# EAGLE board comp-btm (EAGLE 9.6.0)
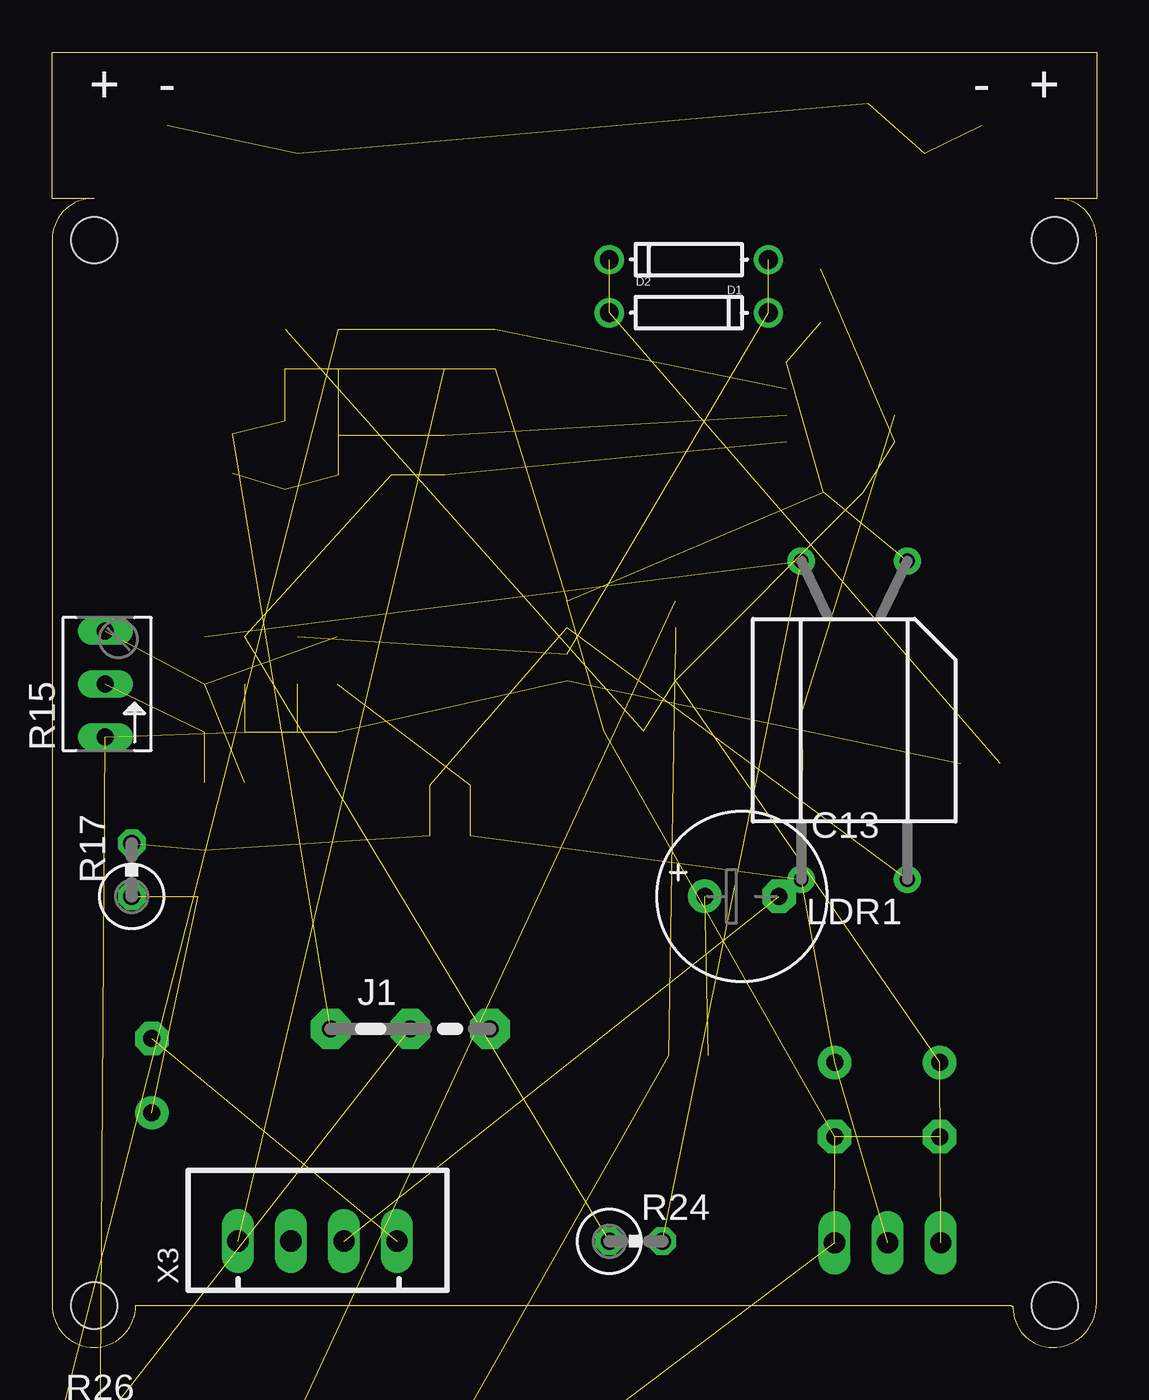
[diagram p0: board, top side]
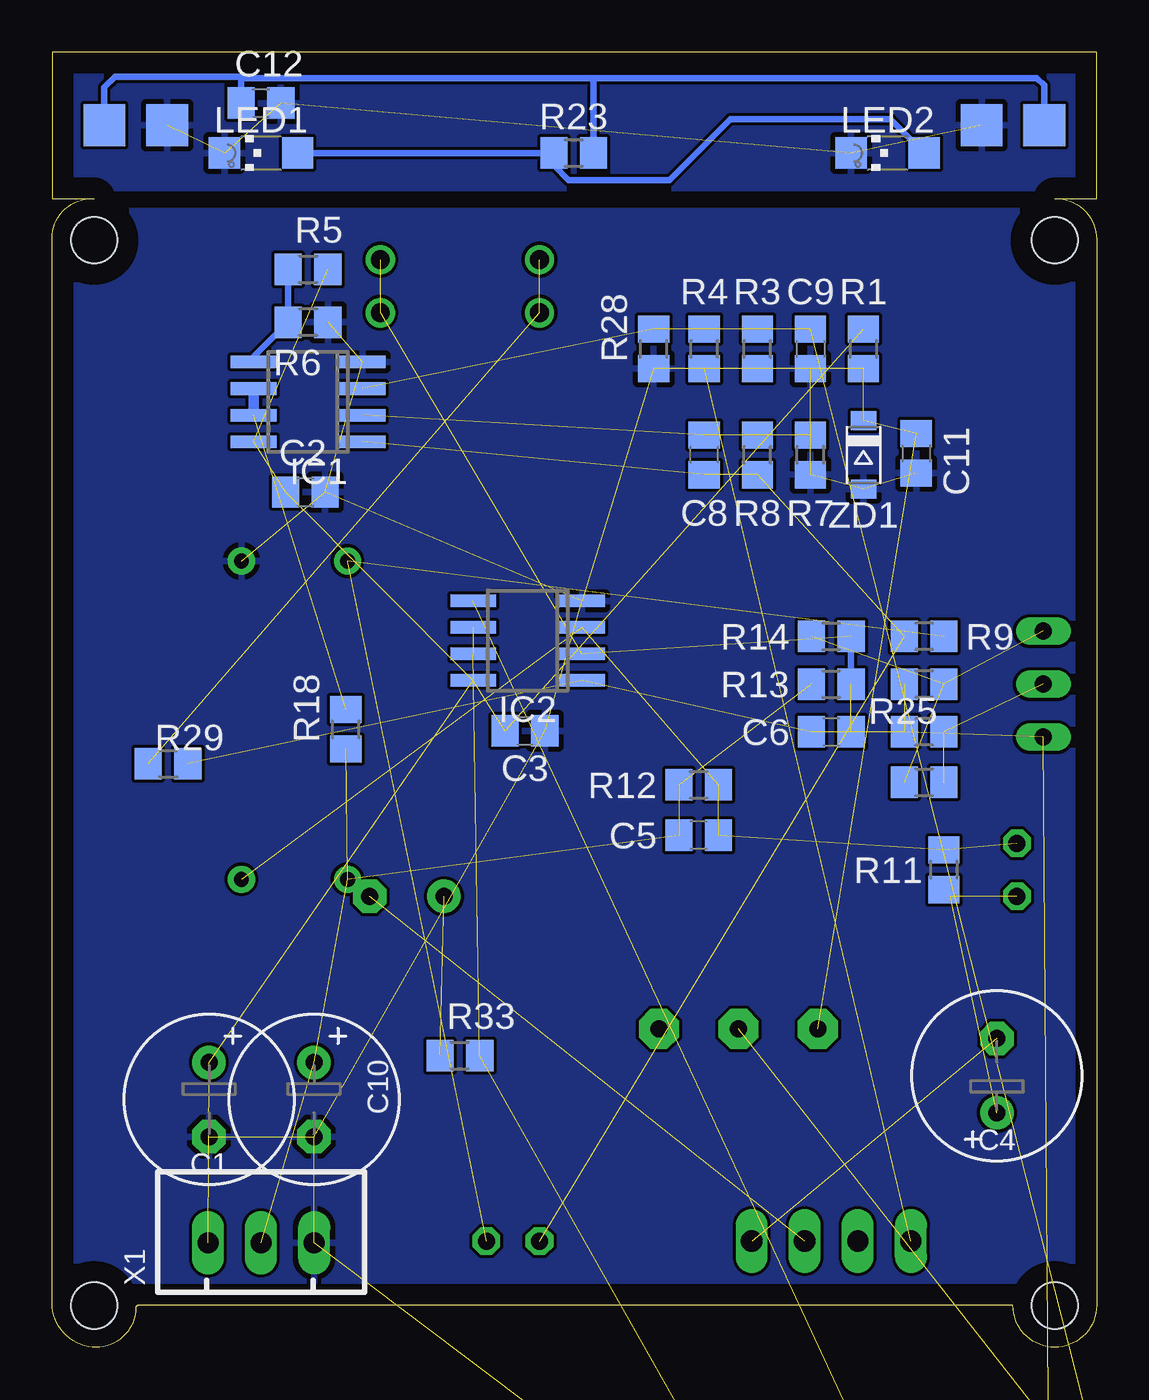
[diagram p1: board, bottom side, seen from below]

Size 50 x 62 mm. Coordinates in mm from the lower left corner, seen from the top.
Outline: 48.1,55 arc-90 50,53.1 50,2.1 arc-90 47.9,0 arc-90 46,1.9 arc90 45.9,2 4,2 arc-90 2,0 arc-90 0,2 0,53.04 arc-90 1.96,55
Outline: 48.1,55 48,55
Outline: 2,55 1.96,55
Outline: 1.96,55 0,55 0,62 50,62 50,55 48.1,55
Copper layers (1*16): Top 0.035mm / dielectric 1.5mm / Bottom 0.035mm
Design rules "default": minimum track width 6mil, minimum drill 0.35mm, track to track 6mil, track to pad 6mil, pad to pad 6mil, via to via 6mil, smd to smd 6mil, copper to edge 40mil, drill to drill 6mil, minimum pad ring 10mil, minimum via ring 8mil, stop-mask expansion 4mil, vias tented up to drill 0mil, thermal gap 10mil
Holes 2.2 mm at 2,53 48,53 2,2 48,2

## Footprints (pad centres in the part's own frame; a part is rotated, then mirrored left to right if it is on the bottom)
TP20SQ = smd 2 x 2: TP 0,0
E3,5-8 = drill 0.813 pad 1.6: + -1.778,0 | drill 0.813 pad 1.6 octagon: - 1.778,0
C0805 = smd 1.3 x 1.5: 1 -0.95,0; 2 0.95,0
DO-1N4148 = drill 0.9: A -3.81,0; C 3.81,0
SO08 = smd 0.6 x 2.2: 1 -1.905,-2.6; 2 -0.635,-2.6; 3 0.635,-2.6; 4 1.905,-2.6; 5 1.905,2.6; 6 0.635,2.6; 7 -0.635,2.6; 8 -1.905,2.6
04C = drill 0.813 pad 1.905 octagon: 1 -1.905,0; 2 1.905,0; 3 5.715,0
VTL5C = drill 0.7 pad 1.3: 1 -7.62,2.54; 2 -7.62,-2.54; 3 7.62,2.54; 4 7.62,-2.54
CHIPLED_1206 = smd 1.5 x 1.5: A 0,-1.75; C 0,1.75
R0805 = smd 1.3 x 1.5: 1 -0.95,0; 2 0.95,0
B64Y = drill 0.813 long: A 2.54,0; E -2.54,0; S 0,0
0309V = drill 0.813 octagon: 1 -1.27,0; 2 1.27,0
JST-XH-03-PACKAGE-LONG-PAD = drill 1.016 long: 1 -2.54,0; 2 0,0; 3 2.54,0
JST-XH-04-PACKAGE-LONG-PAD = drill 1.016 long: 1 -3.81,0; 2 -1.27,0; 3 1.27,0; 4 3.81,0
SOD-123 = smd 0.91 x 1.22: A 1.635,0; C -1.635,0

## Placement (x,y rotation side)
+  TPTP20SQ  [TP20SQ]  2.5,58.5 0 bottom
+1  +  [TP20SQ]  47.5,58.5 0 bottom
-  TPTP20SQ  [TP20SQ]  5.5,58.5 0 bottom
-1  TPTP20SQ  [TP20SQ]  44.5,58.5 0 bottom
C1  10uF  [E3,5-8]  42.5,11.86 270 bottom
C2  100nF  [C0805]  37.88,40.94 0 bottom
C3  100nF  [C0805]  27.37,29.51 0 bottom
C4  10uF  [E3,5-8]  4.77,13 90 bottom
C5  NF  [C0805]  19.05,24.51 180 bottom
C6  470pF  [C0805]  12.7,29.46 0 bottom
C8  470pF  [C0805]  18.78,42.72 90 bottom
C9  470pF  [C0805]  13.7,47.8 270 bottom
C10  10uF  [E3,5-8]  37.47,11.86 270 bottom
C11  NF  [C0805]  8.64,42.8 270 bottom
C12  1uF  [C0805]  40.01,59.56 0 bottom
C13  10uF  [E3,5-8]  33.02,21.59 0 top
C14  1nF  [C0805]  1.27,-21.59 0 top  (outside the outline)
C15  1nF  [C0805]  1.27,-34.29 0 top  (outside the outline)
D1  [DO-1N4148]  30.48,52.07 180 top
D2  [DO-1N4148]  30.48,49.53 0 top
IC1  LM358D  [SO08]  37.75,45.26 90 bottom
IC2  NE5532D  [SO08]  27.24,33.83 90 bottom
J1  [04C]  15.24,15.24 0 top
LDR1  VTL5C4  [VTL5C]  38.4,30.02 270 top
LED1  [CHIPLED_1206]  40,57.17 90 bottom
LED2  [CHIPLED_1206]  10,57.17 90 bottom
R1  10k  [R0805]  11.16,47.8 90 bottom
R2  1k  [R0805]  1.27,-15.24 0 top  (outside the outline)
R3  330k  [R0805]  16.24,47.8 90 bottom
R4  1k  [R0805]  18.78,47.8 90 bottom
R5  1k  [R0805]  37.75,51.61 0 bottom
R6  1k  [R0805]  37.75,49.07 180 bottom
R7  1k  [R0805]  13.7,42.72 90 bottom
R8  47k  [R0805]  16.24,42.72 90 bottom
R9  390R  [R0805]  8.26,34.04 180 bottom
R10  1k  [R0805]  1.27,-27.94 0 top  (outside the outline)
R11  100R  [R0805]  7.31,22.86 90 bottom
R12  NF  [R0805]  19.05,26.92 0 bottom
R13  1k  [R0805]  12.7,31.75 0 bottom
R14  47k  [R0805]  12.7,34.04 0 bottom
R15  1M  [B64Y]  2.54,31.75 90 top
R16  0R  [R0805]  1.27,-40.64 0 top  (outside the outline)
R17  NF  [0309V]  3.81,22.86 90 top
R18  0R  [R0805]  35.94,29.59 90 bottom
R19  0R  [R0805]  8.26,29.46 180 bottom
R20  0R  [R0805]  8.26,27.05 0 bottom
R23  100R  [R0805]  25.03,57.17 0 bottom
R24  NF  [0309V]  27.94,5.08 0 top
R25  0R  [R0805]  8.26,31.75 180 bottom
R26  330k  [R0805]  1.27,-3.81 0 top  (outside the outline)
R28  1k  [R0805]  21.21,47.8 90 bottom
R29  0R  [R0805]  44.45,27.94 0 bottom
R33  100R  [R0805]  30.48,13.97 0 bottom
X1  POWER  [JST-XH-03-PACKAGE-LONG-PAD]  40,5 0 bottom
X3  AUDIO  [JST-XH-04-PACKAGE-LONG-PAD]  12.7,5.08 0 top
ZD1  [SOD-123]  11.16,42.72 270 bottom

## Library data of the parts
+ +1 - -1 = testpad
C1-C6 C8-C15 = rcl; SPICEPREFIX: C
D1 D2 LED1 LED2 = adafruit
IC1 IC2 = linear
J1 = jumper
LDR1 = optocoupler; MF: VACTEC PHOTO; MPN: VTL5C9; OC_FARNELL: 2067857; OC_NEWARK: 95F9033
R1-R14 R16-R20 R23-R26 R28 R29 R33 = rcl; SPICEPREFIX: R
R15 = pot
X1 X3 = JST XH Connectors v1-0 2
ZD1 = dp_devices

## Nets
CTRL: R4.1 X3.1
GND: C1.- C2.2 C3.2 C9.2 C10.- C11.2 C14.2 IC1.4 IC2.4 LDR1.1 R6.1 R7.1 R28.1 X1.3 ZD1.A
INPUT: C4.- X3.4
LED_GND: -1.TP -.TP C12.2 LED1.C LED2.C
N$1: IC1.5 R5.1 R6.2
N$2: C8.2 IC1.2 R7.2 R8.2
N$3: C9.1 IC1.3 R3.2 R4.2 R26.1 R28.2
N$4: C6.2 D1.A D2.C IC2.2 R13.2 R14.2
N$5: C13.+ R33.1
N$6: C8.1 IC1.1 R8.1 R9.2 R24.1
N$7: C5.1 IC2.3 LDR1.3 R11.2 R12.2 R17.2
N$8: C4.+ R11.1 R17.1
N$9: J1.2 R26.2
N$10: LDR1.2 R9.1 R24.2
N$11: C14.1 C15.1 R2.1 R10.2
N$12: R14.1 R15.A R20.1 R25.1
N$14: IC1.6 IC1.7 R18.2
N$15: R15.S R19.1 R20.2
N$17: C15.2 IC2.6 IC2.7 R16.1 R33.2
N$18: LED1.A LED2.A R23.1
N$19: D1.C D2.A R29.1
N$20: +1.TP +.TP C12.1 R23.2
N$21: IC2.5 R10.1
N$22: C11.1 J1.1 R1.1 R3.1 ZD1.C
OUTPUT: X3.2
OUTPUT_INV: C13.- X3.3
V2: C5.2 C10.+ LDR1.4 R12.1 R13.1 R18.1 X1.2
V_OUT: C6.1 IC2.1 R2.2 R15.E R16.2 R19.2 R25.2 R29.2
VCC: C1.+ C2.1 C3.1 IC1.8 IC2.8 R1.2 R5.2 X1.1

## Tracks (layer width: path | path; a pad name or v marks a point on that pad's centre or on a via)
CTRL  (1 unrouted)
GND  (14 unrouted)
  pour Bottom: -1.12,0 52.07,0 52.07,54.38 -1.12,54.38
INPUT  (1 unrouted)
LED_GND  (4 unrouted)
  pour Bottom: 0,62 50,62 50,55.5 0,55.5
N$1
  Bottom 0.305: IC1.5 40.35,47.42 R6.2 R5.1
N$2  (3 unrouted)
N$3  (5 unrouted)
N$4  (4 unrouted)
  Bottom 0.305: R14.2 R13.2
N$5  (1 unrouted)
N$6  (4 unrouted)
N$7  (5 unrouted)
N$8  (2 unrouted)
  Bottom 0.305: 6.99,21.59 R11.1
N$9  (1 unrouted)
N$10  (2 unrouted)
N$11  (3 unrouted)
N$12  (3 unrouted)
N$14  (1 unrouted)
  Bottom 0.508: IC1.6 IC1.7
N$15  (2 unrouted)
N$17  (4 unrouted)
N$18
  Bottom 0.305: LED1.A R23.1 25.98,56.59 25.27,55.88 20.45,55.88 17.53,58.8 9.88,58.8 LED2.A
N$19  (2 unrouted)
N$20
  Bottom 0.305: +1.TP 47.5,60.32 46.99,60.83 41.02,60.83 40.95,60.77 | C12.1 40.95,60.77 | 40.95,60.77 24,60.77 | 24,60.77 2.85,60.77 2.5,60.41 +.TP | R23.2 24.08,60.69 24,60.77
N$21  (1 unrouted)
N$22  (4 unrouted)
OUTPUT_INV  (1 unrouted)
V2  (6 unrouted)
V_OUT  (7 unrouted)
VCC  (7 unrouted)

## Text on the board
tNames: + | - | - | +